# EAGLE board AVR (EAGLE 7.4.0)
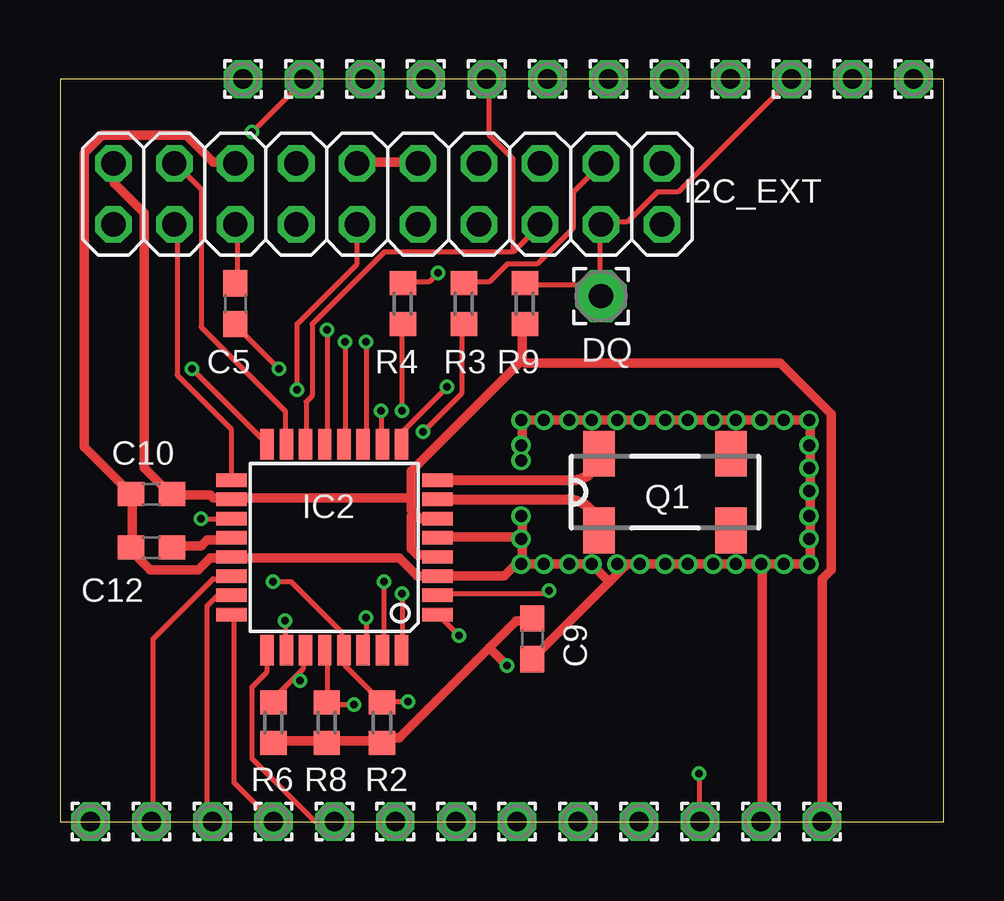
[diagram p0: board, top side]
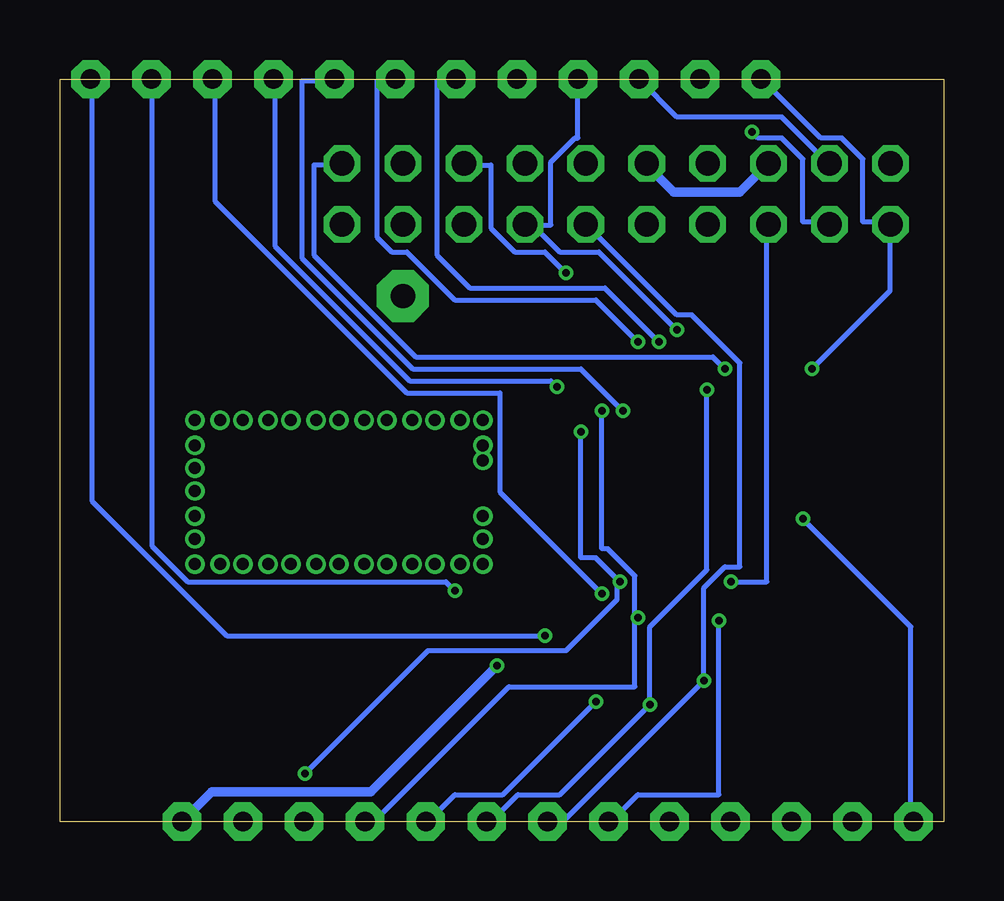
[diagram p1: board, bottom side, seen from below]

Size 36.83 x 30.95 mm. Coordinates in mm from the lower left corner, seen from the top.
Outline: 0,30.95 0,0 36.83,0 36.83,30.95 0,30.95
Copper layers (1*16): Top 0.035mm / dielectric 1.5mm / Bottom 0.035mm
Design rules "PMServicesStd": minimum track width 8mil, minimum drill 12mil, track to track 8mil, track to pad 8mil, pad to pad 8mil, via to via 8mil, smd to smd 0mil, copper to edge 10mil, drill to drill 10mil, minimum pad ring 10mil, minimum via ring 6mil, stop-mask expansion 2mil, vias tented up to drill 100mil, thermal gap 10mil
Net classes: 0 default: width 0.203 mm; 1 supply: width 0.4 mm, clearance 0.203 mm; 2 ant: width 2.184 mm

## Footprints (pad centres in the part's own frame; a part is rotated, then mirrored left to right if it is on the bottom)
C0603 = smd 1.1 x 1: 1 -0.85,0; 2 0.85,0
2,15/1,0 = drill 1.016 pad 2.159 octagon: 1 0,0
2X10 = drill 1.016 octagon: 1 -11.43,-1.27; 2 -11.43,1.27; 3 -8.89,-1.27; 4 -8.89,1.27; 5 -6.35,-1.27; 6 -6.35,1.27; 7 -3.81,-1.27; 8 -3.81,1.27; 9 -1.27,-1.27; 10 -1.27,1.27; 11 1.27,-1.27; 12 1.27,1.27; 13 3.81,-1.27; 14 3.81,1.27; 15 6.35,-1.27; 16 6.35,1.27; 17 8.89,-1.27; 18 8.89,1.27; 19 11.43,-1.27; 20 11.43,1.27
TQFP32-08 = smd 1.27 x 0.559: 1 -4.293,2.8; 2 -4.293,2; 3 -4.293,1.2; 4 -4.293,0.4; 5 -4.293,-0.4; 6 -4.293,-1.2; 7 -4.293,-2; 8 -4.293,-2.8; 17 4.293,-2.8; 18 4.293,-2; 19 4.293,-1.2; 20 4.293,-0.4; 21 4.293,0.4; 22 4.293,1.2; 23 4.293,2; 24 4.293,2.8 | smd 0.559 x 1.27: 9 -2.8,-4.293; 10 -2,-4.293; 11 -1.2,-4.293; 12 -0.4,-4.293; 13 0.4,-4.293; 14 1.2,-4.293; 15 2,-4.293; 16 2.8,-4.293; 25 2.8,4.293; 26 2,4.293; 27 1.2,4.293; 28 0.4,4.293; 29 -0.4,4.293; 30 -1.2,4.293; 31 -2,4.293; 32 -2.8,4.293
1,6/0,8 = drill 0.813 pad 1.6 octagon: 1 0,0
MC-306 = smd 1.3 x 1.9: 1 -2.75,-1.6; 2 2.75,-1.6; 3 2.75,1.6; 4 -2.75,1.6
R0603 = smd 1 x 1.1: 1 -0.85,0; 2 0.85,0

## Placement (x,y rotation side)
C5  100nF  [C0603]  7.3,21.59 270 top
C9  100nF  [C0603]  19.68,7.62 270 top
C10  100nF  [C0603]  3.81,13.65 180 top
C12  100nF  [C0603]  3.81,11.43 180 top
DQ  [2,15/1,0]  22.54,21.91 270 top
I2C_EXT  [2X10]  13.65,26.16 0 top
IC2  ATMEGA168-AU  [TQFP32-08]  11.43,11.43 180 top
PAD1  [1,6/0,8]  21.59,0 0 top
PAD2  [1,6/0,8]  29.21,0 0 top
PAD3  [1,6/0,8]  31.75,0 0 top
PAD4  [1,6/0,8]  6.35,0 0 top
PAD5  [1,6/0,8]  8.89,0 0 top
PAD6  [1,6/0,8]  11.43,0 0 top
PAD7  [1,6/0,8]  13.97,0 0 top
PAD8  [1,6/0,8]  16.51,0 0 top
PAD9  [1,6/0,8]  19.05,0 0 top
PAD10  [1,6/0,8]  1.27,0 0 top
PAD11  [1,6/0,8]  3.81,0 0 top
PAD12  [1,6/0,8]  24.13,0 0 top
PAD13  [1,6/0,8]  26.67,0 0 top
PAD14  [1,6/0,8]  30.48,30.95 90 top
PAD15  [1,6/0,8]  35.56,30.95 90 top
PAD16  [1,6/0,8]  33.02,30.95 90 top
PAD17  [1,6/0,8]  27.94,30.95 90 top
PAD18  [1,6/0,8]  25.4,30.95 90 top
PAD19  [1,6/0,8]  22.86,30.95 90 top
PAD20  [1,6/0,8]  20.32,30.95 90 top
PAD21  [1,6/0,8]  15.24,30.95 90 top
PAD22  [1,6/0,8]  17.78,30.95 90 top
PAD23  [1,6/0,8]  12.7,30.95 90 top
PAD24  [1,6/0,8]  7.62,30.95 90 top
PAD25  [1,6/0,8]  10.16,30.95 90 top
Q1  32768Hz  [MC-306]  25.21,13.73 0 top
R2  4.7K  [R0603]  13.42,4.13 90 top
R3  4.7K  [R0603]  16.83,21.59 90 top
R4  4.7K  [R0603]  14.29,21.59 90 top
R6  4.7K  [R0603]  8.89,4.13 90 top
R8  4.7K  [R0603]  11.11,4.13 270 top
R9  4.7K  [R0603]  19.37,21.59 270 top

## Library data of the parts
C5 C9 C10 C12 R2-R4 R6 R8 R9 = resistor
DQ PAD1-PAD25 = wirepad
I2C_EXT = pinhead
IC2 = Arduino-AVR
Q1 = crystal; MPN: MC-306 60.0KHZ 100PPM ,12.5PF; OC_FARNELL: 1278040; OC_NEWARK: 31M5576

## Nets
D2: DQ.1 I2C_EXT.17 IC2.32 PAD14.1 R9.1
GND [supply]: C9.2 C10.2 C12.2 I2C_EXT.6 I2C_EXT.10 I2C_EXT.12 IC2.3 IC2.5 IC2.21 PAD2.1
IO_POWER_UP [supply]: I2C_EXT.19
N$1: I2C_EXT.18 R3.2
N$2: IC2.23 PAD4.1
N$3: I2C_EXT.16 R4.2
N$4: C5.2 I2C_EXT.20
N$5: IC2.24 PAD5.1
N$6 [supply]: C12.1 IC2.20
N$7: IC2.25 PAD6.1
N$8: IC2.19 PAD10.1
N$9: IC2.1 PAD15.1
N$10: IC2.2 PAD16.1
N$11: IC2.9 PAD17.1
N$12: IC2.10 PAD18.1
N$13: IC2.11 PAD19.1
N$14: IC2.26 PAD7.1
N$15: IC2.22 PAD11.1
N$16: IC2.12 PAD20.1
RESET: C5.1 I2C_EXT.5 IC2.29 PAD1.1 R2.2
RFM_IRQ: I2C_EXT.13 IC2.13 PAD21.1
RX: IC2.31 PAD13.1 R3.1
SCL: I2C_EXT.9 IC2.28 PAD9.1 R8.1
SDA: I2C_EXT.11 IC2.27 PAD8.1 R6.2
SPI_MISO: I2C_EXT.1 IC2.16 PAD24.1
SPI_MOSI: I2C_EXT.4 IC2.15 PAD23.1
SPI_NSS: I2C_EXT.15 IC2.14 PAD22.1
SPI_SCK: I2C_EXT.3 IC2.17 PAD25.1
TX: IC2.30 PAD12.1 R4.1
VCC [supply]: C9.1 C10.1 I2C_EXT.2 IC2.4 IC2.6 IC2.18 PAD3.1 R2.1 R6.1 R8.2 R9.2
XTAL1: IC2.8 Q1.4
XTAL2: IC2.7 Q1.1

## Tracks (layer width: path | path; a pad name or v marks a point on that pad's centre or on a via)
D2  (via drill 0.3)
  Top 0.203: R9.1 19.38,22.38 22.12,22.38 22.5,22 DQ.1 22.5,22.12 22.5,24.88 I2C_EXT.17 22.62,25 23.62,25 24.88,26.25 25.75,26.25 30.38,30.88 PAD14.1 | v14.25,9.5 14.25,7.25 IC2.32
  Bottom 0.203: v14.25,9.5 18.5,13.75 18.5,17.88 22.38,17.88 30.38,25.88 30.38,30.88 PAD14.1
GND  (via drill 0.5)
  Top 0.4: v19.21,15.05 19.25,15.12 19.25,15.62 v19.21,15.69 19.25,15.88 19.25,16.62 v19.21,16.73 19.38,16.75 20.12,16.75 v20.16,16.73 20.25,16.75 21,16.75 v21.21,16.73 21.25,16.75 22.12,16.75 v22.16,16.73 22.25,16.75 23,16.75 v23.21,16.73 23.25,16.75 24.12,16.75 v24.16,16.73 24.25,16.75 25,16.75 v25.21,16.73 25.25,16.75 26.12,16.75 v26.16,16.73 26.25,16.75 27,16.75 v27.21,16.73 27.25,16.75 28.12,16.75 v28.16,16.73 28.25,16.75 29,16.75 v29.21,16.73 29.25,16.75 30.12,16.75 v30.16,16.73 30.25,16.75 31,16.75 v31.21,16.73 31.25,16.62 31.25,15.88 v31.21,15.69 31.25,15.62 31.25,14.88 v31.21,14.73 31.25,14.62 31.25,13.88 v31.21,13.78 31.25,13.62 31.25,12.88 v31.21,12.73 31.25,12.62 31.25,11.88 v31.21,11.78 31.25,11.62 31.25,10.88 v31.21,10.73 31.12,10.75 30.25,10.75 v30.16,10.73 30.12,10.75 29.25,10.75 v29.21,10.73 | v29.21,10.73 29,10.75 28.25,10.75 v28.16,10.73 28.12,10.75 27.25,10.75 v27.21,10.73 27,10.75 26.25,10.75 v26.16,10.73 26.12,10.75 25.25,10.75 v25.21,10.73 25,10.75 24.25,10.75 v24.16,10.73 24.12,10.75 23.25,10.75 v23.21,10.73 23.5,10.62 22.88,10 | PAD2.1 29.25,0 29.25,10.62 v29.21,10.73 | I2C_EXT.12 14.88,27.5 12.5,27.5 I2C_EXT.10 | 22.88,10 19.75,6.88 C9.2 | v19.21,11.78 19.25,11.88 19.25,12.62 v19.21,12.73 | v19.21,10.73 19.25,10.75 20.12,10.75 v20.16,10.73 20.25,10.75 21,10.75 v21.21,10.73 21.25,10.75 22.12,10.75 v22.16,10.73 22.25,10.62 22.88,10 | v19.21,11.78 19.25,11.62 19.25,10.88 v19.21,10.73 | v19.21,10.73 19,10.75 18.5,10.25 15.75,10.25 IC2.3 15.62,10.25 14.88,10.25 14.12,11 7.25,11 IC2.21 7.12,11 6.25,11 5.75,10.5 3.75,10.5 3,11.25 C12.2 3,11.5 3,13.62 C10.2 2.88,13.75 1,15.62 1,27.88 1.75,28.62 5.25,28.62 6.38,27.5 7.25,27.5 I2C_EXT.6
  Top 0.4: IC2.5 15.75,11.88 19.12,11.88 v19.21,11.78
  Bottom 0.4: I2C_EXT.6 7.38,27.38 8.5,26.25 11.25,26.25 12.38,27.38 I2C_EXT.10
N$1
  Top 0.203: R3.2 16.88,22.5 17.88,22.5 18.62,23.25 19.88,23.25 21.38,24.75 21.38,26.25 22.5,27.38 I2C_EXT.18
N$2
  Top 0.203: IC2.23 7.12,9.38 6.5,9.38 6.12,9 6.12,0.12 6.25,0 PAD4.1
N$3  (via drill 0.3)
  Top 0.203: v15.75,22.88 15.38,22.5 14.38,22.5 R4.2
  Bottom 0.203: v15.75,22.88 16.62,23.75 17.88,23.75 18.88,24.75 18.88,27.38 20,27.38 I2C_EXT.16
N$4  (via drill 0.3)
  Top 0.203: v9.12,18.88 7.38,20.62 C5.2
  Bottom 0.203: v9.12,18.88 9.62,19.38 22,19.38 26.25,23.62 26.25,27.38 25.12,27.38 I2C_EXT.20
N$5
  Top 0.203: IC2.24 7.25,8.62 7.25,1.62 8.88,0 PAD5.1
N$6
  Top 0.4: C12.1 4.75,11.5 5.88,11.5 6.12,11.75 7.12,11.75 IC2.20
N$7
  Top 0.203: PAD6.1 10.62,0 8,2.62 8,5.62 8.62,6.25 8.62,7.12 IC2.25
N$8  (via drill 0.3)
  Top 0.203: v5.88,12.62 7.12,12.62 IC2.19
  Bottom 0.203: v5.88,12.62 1.38,8.12 1.38,0 PAD10.1
N$9  (via drill 0.3)
  Top 0.203: v16.62,7.75 15.75,8.62 IC2.1
  Bottom 0.203: v16.62,7.75 29.88,7.75 35.5,13.38 35.5,30.88 PAD15.1
N$10  (via drill 0.3)
  Top 0.203: v20.38,9.62 20.25,9.5 15.75,9.5 IC2.2
  Bottom 0.203: v20.38,9.62 20.75,10 31.5,10 33,11.5 33,30.88 PAD16.1
N$11  (via drill 0.3)
  Top 0.203: v16.12,18.12 14.25,16.25 14.25,15.75 IC2.9
  Bottom 0.203: v16.12,18.12 16.38,18.38 22.25,18.38 27.88,24 27.88,30.88 PAD17.1
N$12  (via drill 0.3)
  Top 0.203: v13.38,17.12 13.38,15.75 IC2.10
  Bottom 0.203: v13.38,17.12 15.12,18.88 22.12,18.88 26.75,23.5 26.75,30.88 25.5,30.88 PAD18.1
N$13  (via drill 0.3)
  Top 0.203: v12.75,20 12.75,15.75 IC2.11
  Bottom 0.203: v12.75,20 14.5,21.75 20.38,21.75 22.38,23.75 23,23.75 23.62,24.38 23.62,30.88 22.88,30.88 PAD19.1
N$14  (via drill 0.3)
  Top 0.203: v9.38,8.38 9.38,7.25 IC2.26
  Bottom 0.203: v9.38,8.38 9.38,1.12 12.75,1.12 13.88,0 PAD7.1
N$15
  Top 0.203: IC2.22 7.12,10.12 6.38,10.12 3.88,7.62 3.88,0 PAD11.1
N$16  (via drill 0.3)
  Top 0.203: v11.88,20 11.88,15.75 IC2.12
  Bottom 0.203: v11.88,20 14.12,22.25 19.75,22.25 21.12,23.62 21.12,30.88 20.38,30.88 PAD20.1
RESET  (via drill 0.3)
  Top 0.203: C5.1 7.38,22.5 7.38,24.88 I2C_EXT.5 | v14.5,5 13.5,5 R2.2 13.38,5 11.88,6.5 11.88,7.12 IC2.29 11.75,7.25 11.75,7.88 9.62,10 v8.88,10
  Bottom 0.203: v14.5,5 18.38,1.12 20.38,1.12 21.5,0 PAD1.1 | v8.88,10 7.38,10 7.38,24.88 I2C_EXT.5
RFM_IRQ  (via drill 0.3)
  Top 0.203: v11.12,20.5 11.12,15.75 IC2.13
  Bottom 0.203: v11.12,20.5 14.38,23.75 16,23.75 17.12,24.88 17.38,24.88 I2C_EXT.13 17,24.88 16.38,24.88 16.38,27.5 15.38,28.5 15.25,28.5 15.25,30.88 PAD21.1
RX  (via drill 0.3)
  Top 0.203: v15.12,16.25 16.75,17.88 16.75,20.62 R3.1 | v13.5,10 13.5,7.25 IC2.31 | v26.62,2 26.62,0 PAD13.1
  Bottom 0.203: v15.12,16.25 15.12,11 14.5,11 v13.5,10 13.62,10 13.62,9.25 15.75,7.12 21.5,7.12 v26.62,2
SCL  (via drill 0.3)
  Top 0.203: IC2.28 11.12,7.12 11.12,5 R8.1 11.12,4.88 v12.25,4.88 | v9.88,18 9.88,20.75 12.38,23.25 12.38,24.88 I2C_EXT.9
  Bottom 0.203: PAD9.1 18.88,0 17.75,1.12 16,1.12 v12.25,4.88 12.25,8.12 9.88,10.5 v9.88,18
SDA  (via drill 0.3)
  Top 0.203: 9.81,6.06 10.12,6.38 10.12,7.12 IC2.27 | 9.81,6.06 9,5.25 9,5 R6.2 | v10,5.88 9.81,6.06
  Bottom 0.203: PAD8.1 15.88,0 v10,5.88 10,9.75 9.12,10.62 8.5,10.62 8.5,19.12 10.5,21.12 11.12,21.12 14.88,24.88 I2C_EXT.11
SPI_MISO  (via drill 0.3)
  Top 0.203: v5.5,18.88 8.62,15.75 IC2.16
  Bottom 0.203: v5.5,18.88 2.25,22.12 2.25,24.88 I2C_EXT.1 2.25,25 3.38,25 3.38,27.62 4.25,28.5 5.12,28.5 7.5,30.88 PAD24.1
SPI_MOSI
  Top 0.203: IC2.15 9.38,15.75 9.38,17.12 5.88,20.62 5.88,26.38 4.88,27.38 I2C_EXT.4
  Bottom 0.203: PAD23.1 11.12,29.38 6.75,29.38 4.88,27.5 I2C_EXT.4
SPI_NSS
  Top 0.203: 18.94,23.81 20,24.88 I2C_EXT.15 | 18.94,23.81 18.88,23.75 13.5,23.75 10.5,20.75 10.5,17.75 10.25,17.5 10.25,15.75 IC2.14 | PAD22.1 17.88,30.88 17.88,28.62 18.88,27.62 18.88,23.88 18.94,23.81
SPI_SCK  (via drill 0.3)
  Top 0.203: IC2.17 7.12,14.25 7.12,16.38 4.88,18.62 4.88,24.88 I2C_EXT.3 | v8,28.75 10.12,30.88 PAD25.1
  Bottom 0.203: v8,28.75 7.75,28.5 6.75,28.5 5.88,27.62 5.88,25 4.88,25 I2C_EXT.3
TX  (via drill 0.3)
  Top 0.203: v14.25,17.12 14.25,20.62 R4.1 | v12.75,8.5 12.75,7.25 IC2.30
  Bottom 0.203: v14.25,17.12 14.25,11.38 14,11.38 12.88,10.25 12.88,8.5 | 12.88,8.5 12.88,5.62 18.12,5.62 23.75,0 PAD12.1 | 12.88,8.5 v12.75,8.5
VCC  (via drill 0.3)
  Top 0.4: R6.1 9,3.38 11,3.38 R8.2 11.25,3.38 13.38,3.38 R2.1 13.5,3.5 14.12,3.5 17.88,7.25 | 17.88,7.25 19,8.38 19.62,8.38 C9.1 | 19.25,19.25 19.25,20.62 R9.2 | 19.25,19.25 14.62,14.62 14.62,13.5 | 14.62,13.5 14.62,13 14.75,12.88 | 14.75,12.88 15,12.62 15.62,12.62 IC2.6 | IC2.4 15.62,11.12 14.88,11.12 14.62,11.38 14.62,12.75 14.75,12.88 | 14.62,13.5 7.25,13.5 IC2.18 7.12,13.5 6.38,13.5 6.25,13.62 4.75,13.62 C10.1 4.5,13.75 3.5,14.75 3.5,25.38 2.25,26.62 2.25,27.38 I2C_EXT.2 | PAD3.1 31.75,10.12 32.12,10.5 32.12,17 30,19.12 19.38,19.12 19.25,19.25 | v18.62,6.5 17.88,7.25
  Bottom 0.4: v18.62,6.5 23.88,1.25 30.5,1.25 PAD3.1
XTAL1
  Top 0.406: IC2.8 21.36,14.23 arc90 Q1.4
XTAL2
  Top 0.406: IC2.7 21.16,13.43 arc-90 Q1.1